# Altium PCB LC_MATCH_1.PcbDoc
Units mm, origin at the board's own origin, x right, y up, seen from the top; angles counter-clockwise.
Board outline 36.83 x 33.78 mm, 2 copper layers (Top Layer, Bottom Layer); 12 components, 7 nets, 36 pads, 14 vias.
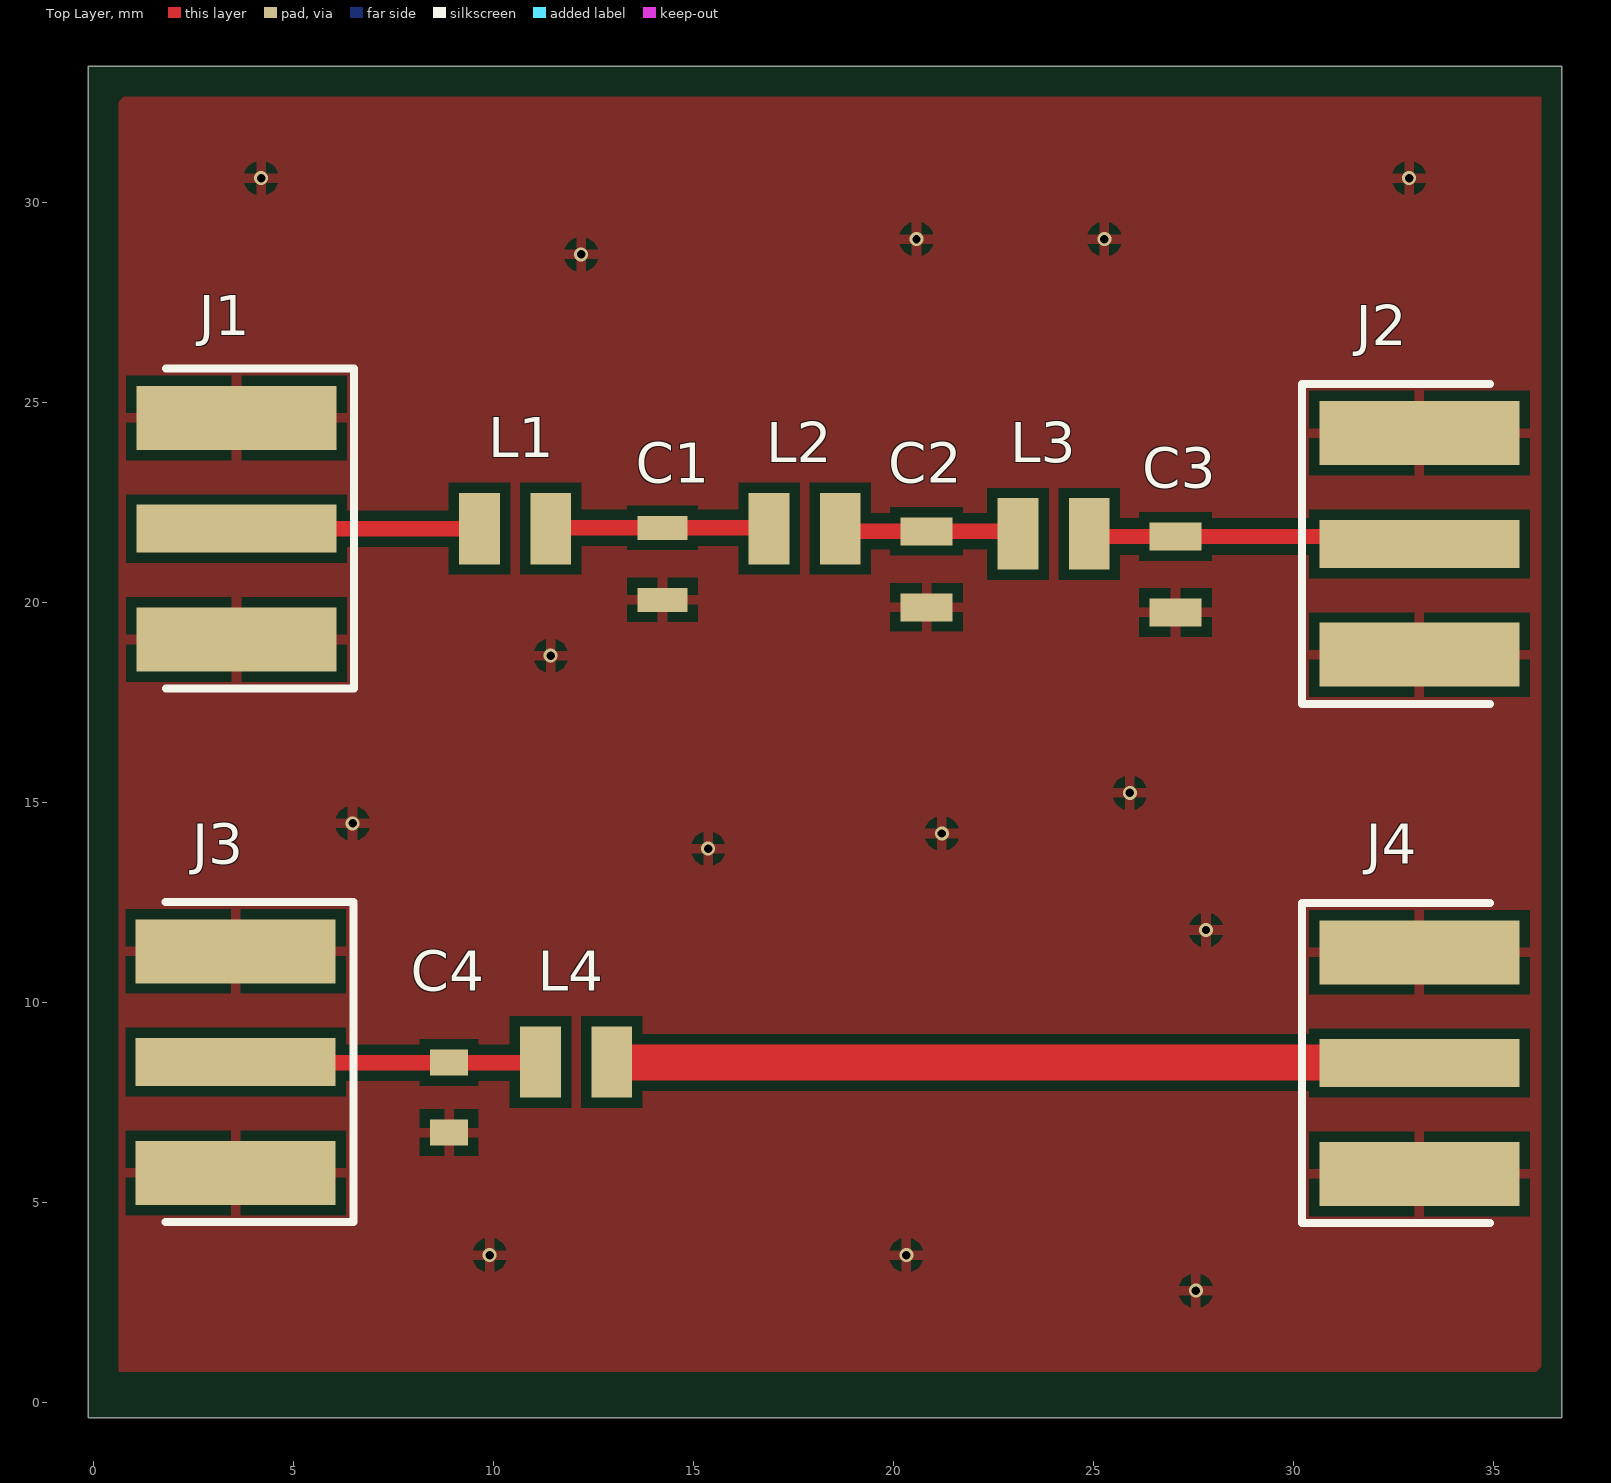
[diagram p0: Top Layer view]
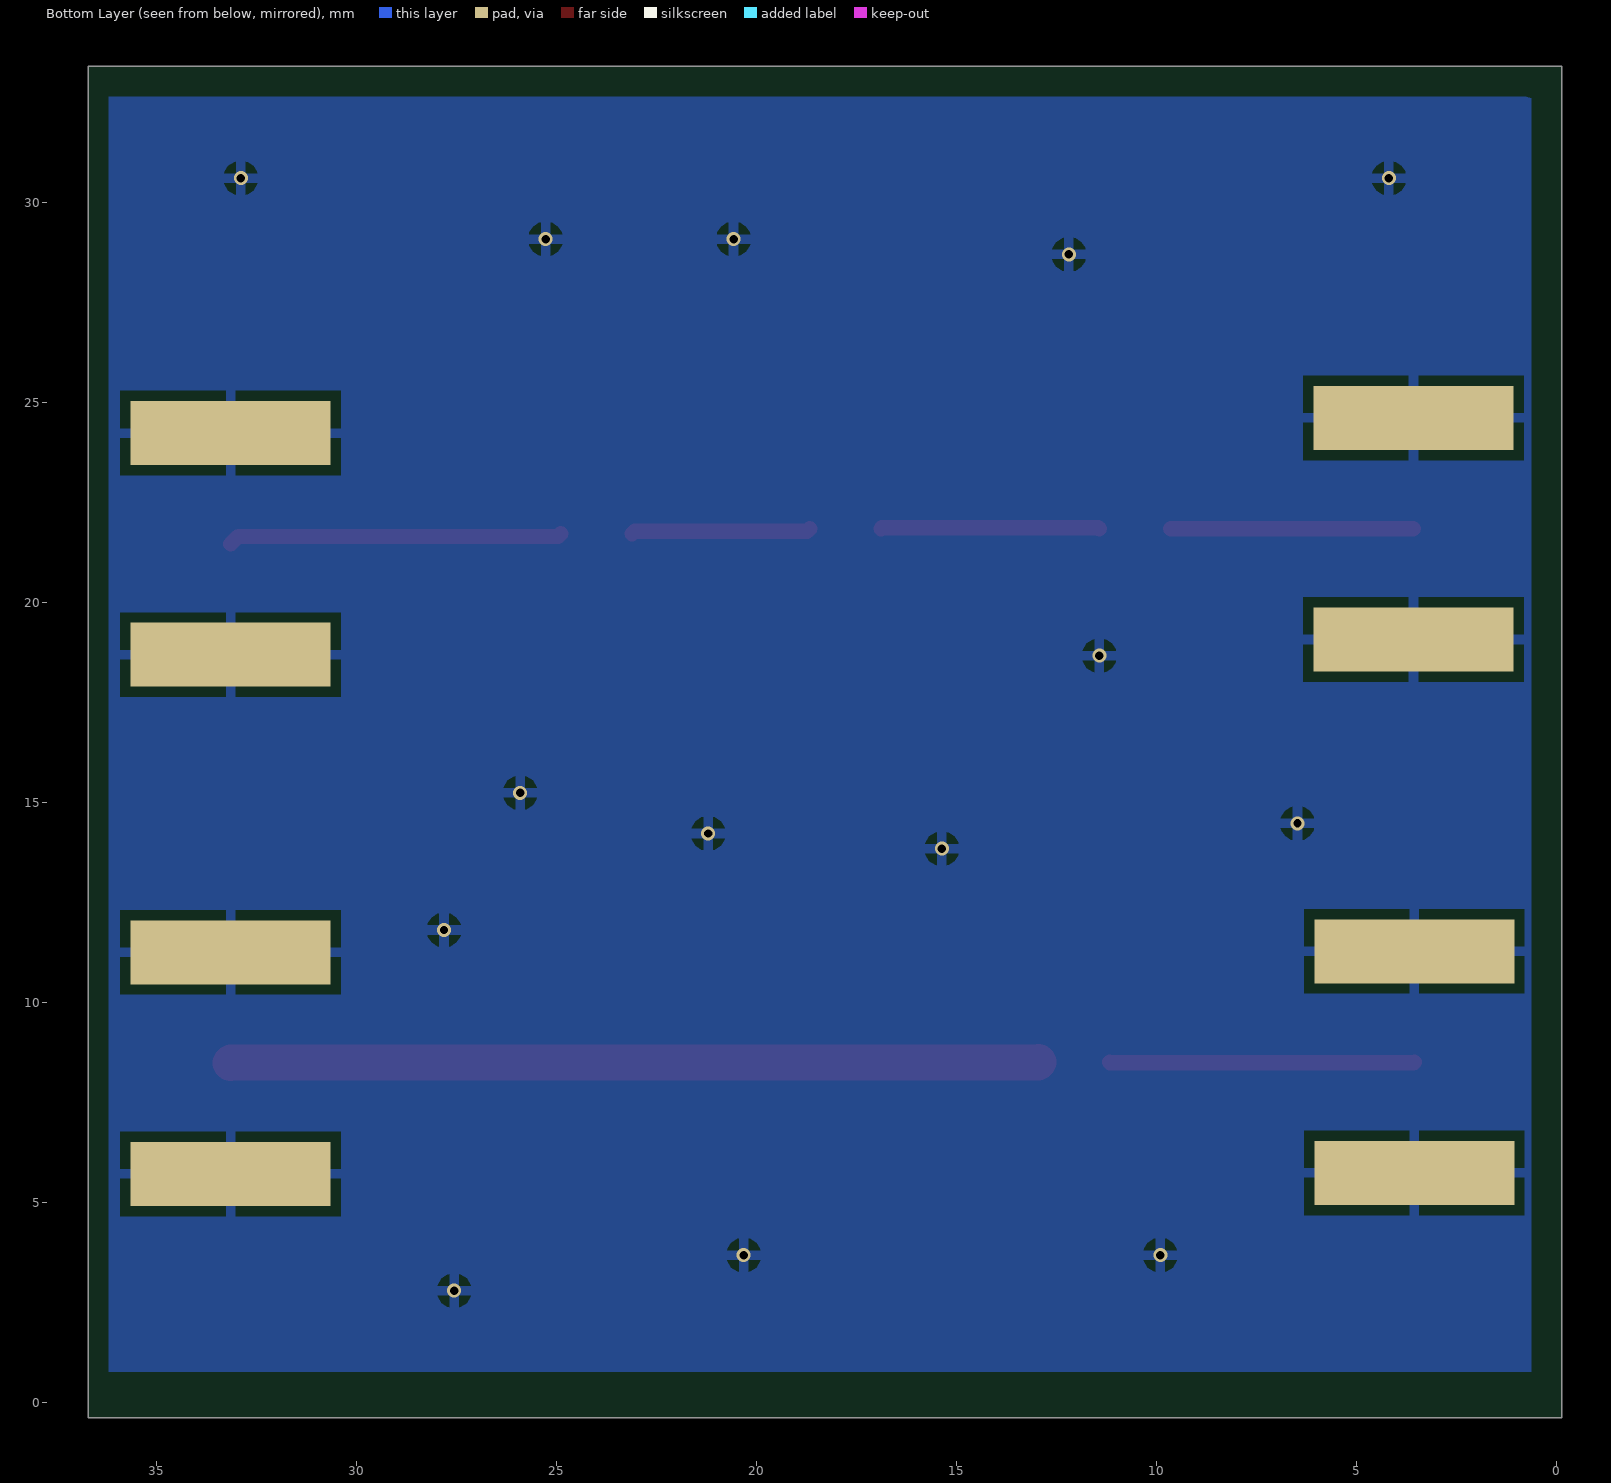
[diagram p1: Bottom Layer view, seen from below]
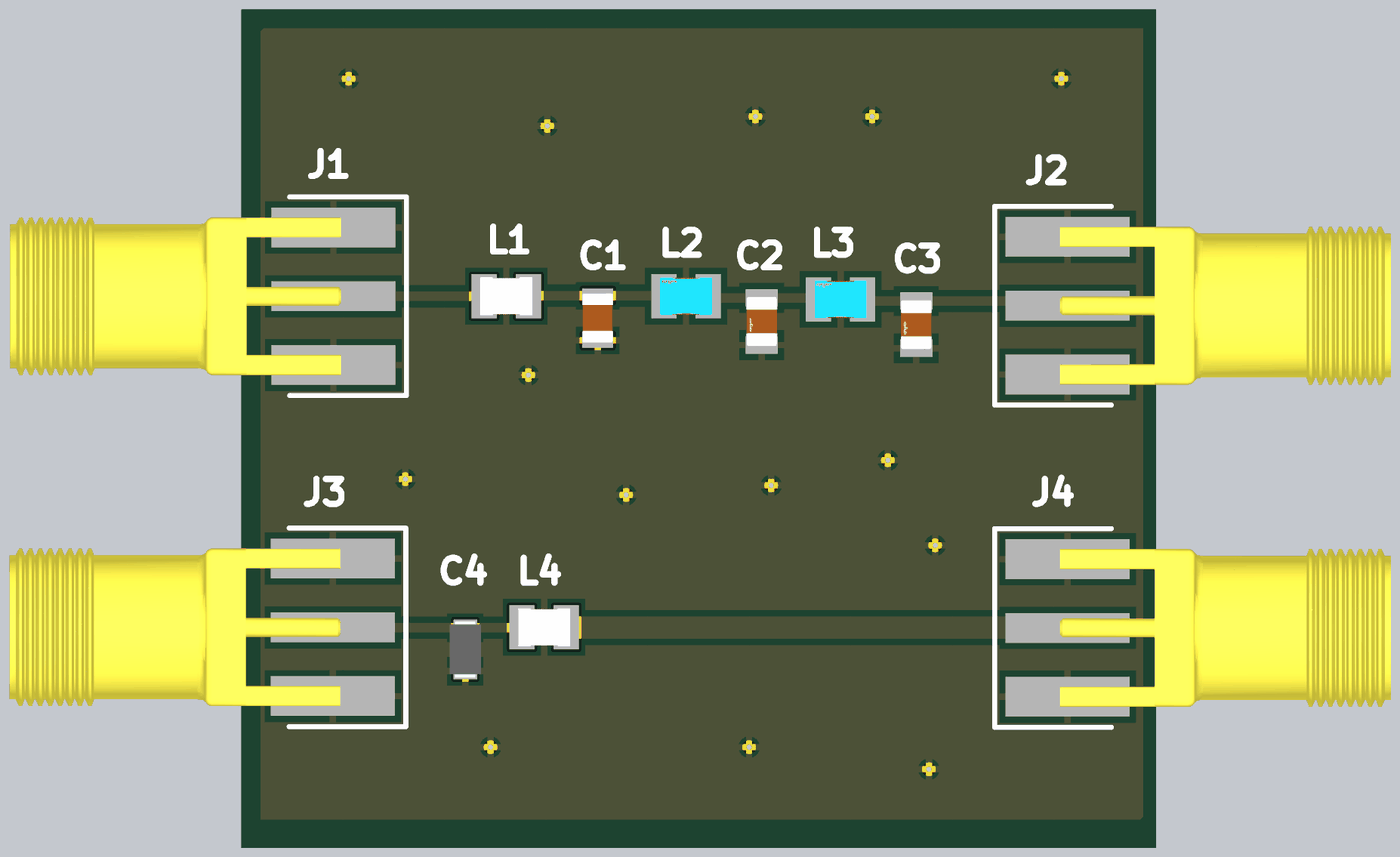
[diagram p2: 3D render of the assembled board from above, using the file's embedded part models]

## Layer stack, top to bottom
Top Solder: solder mask 0.0102, Solder Resist, Dk 3.5
Top Layer: signal copper 0.0356
Dielectric 1: dielectric 0.32, FR-4, Dk 4.8
Bottom Layer: signal copper 0.0356
Bottom Solder: solder mask 0.0102, Solder Resist, Dk 3.5

## Board outline
-0.127,-0.381 36.703,-0.381 36.703,33.401 -0.127,33.401

## Design rules (kind name [scope] priority, off if disabled: settings)
Clearance [All] p1: gap=0.254 ignorepadtopadclearanceinfootprint=FALSE except(0: Arc-Hole Track-Hole SMDPad-Hole THPad-Hole Via-Hole Fill-Hole Poly-Hole Region-Hole Text-Hole; 0.15: Arc-Arc Arc-Track Arc-SMDPad Track-Track Track-SMDPad SMDPad-SMDPad; 0.5: THPad-THPad)
MinimumSolderMaskSliver [All] p1: minsoldermaskwidth=0.1
PolygonConnect [All] p1: connectstyle=Relief reliefconductorwidth=0.254 reliefentries=4 polygonreliefangle="90 Angle" airgapwidth=0.254
RoutingLayers [All] p1: top layer_v5=TRUE bottom layer_v5=FALSE
RoutingVias [All] p1: holewidth=0.15 width=0.25 viastyle="Through Hole" minholewidth=0.15 minwidth=0.25 maxholewidth=0.2 maxwidth=0.3
SolderMaskExpansion [All] p1: expansion=0.102 istentingtop=FALSE
Width [All] p1: maxlimit=0.9 minlimit=0.15 preferedwidth=0.254 minimp=50.000000 maximp=50.000000 favimp=50.000000
28 further rules are at their usual default settings.

## Components (designator, comment, footprint, x,y, rotation, side; value= is the part's Value field where it differs from the comment)
C1 "GRM21A5C2J820JWA1D" GRM21x 14.224,20.966 r90 top
C2 "GQM2195C2E430GB12D" FP-GRM21A-0_2-MFG 20.828,20.828 r270 top
C3 "GQM2195C2E300GB12D" FP-GRM21A-0_2-MFG 27.051,20.701 r270 top
C4 "GQM2195C2E430GB12D" GQM2195C2E100GB12D 8.89,7.62 r90 top
J1 "CON-SMA-EDGE-S" FP-CON-SMA-EDGE-S-MFG -3.683,21.844 r90 top
J2 "CON-SMA-EDGE-S" FP-CON-SMA-EDGE-S-MFG 40.407,21.463 r270 top
J3 "CON-SMA-EDGE-S" FP-CON-SMA-EDGE-S-MFG -3.704,8.509 r90 top
J4 "CON-SMA-EDGE-S" FP-CON-SMA-EDGE-S-MFG 40.407,8.485 r270 top
L1 "LQW2BAS18NJ00L" LQW2BAN11NG00L 10.541,21.844 r0 top
L2 "LQW2BAS56NG00L" FP-LQW2BAN_00-MFG 17.78,21.844 r180 top
L3 "LQW2BAS56NG00L" FP-LQW2BAN_00-MFG 24.004,21.717 r180 top
L4 "LQW2BAS27NJ00L" LQW2BAN11NG00L 12.065,8.509 r0 top

## Footprints (in the part's own frame and the unit in brackets; to place one, negate y for a bottom-side part, rotate by r counter-clockwise, add the part's x,y. Pads: shape width x height; smd on the part's side, far side on the other; paste and mask are expansions set on the pad)
FP-CON-SMA-EDGE-S-MFG [mm]
  rect 1.2x5 smd paste+0 mask+0: 1(0,-7.26)
  rect 1.6x5 smd paste+0 mask+0: 2(-2.77,-7.26) 3(2.77,-7.26)
  rect 1.6x5 smd far side paste+0 mask+0: 4(-2.77,-7.26) 5(2.77,-7.26)
  silkscreen extent -4,-10.2 4,-5.5, body extent -3.67,-9.86 3.67,4.86, height 0.25
FP-GRM21A-0_2-MFG [mm]
  rect 0.7x1.3 smd paste+0 mask+0: 1(-0.95,0) 2(0.95,0)
  body extent -1.4,-0.82 1.4,0.82, height 0.25
FP-LQW2BAN_00-MFG [mm]
  rect 1.02x1.78 smd paste+0 mask+0: 1(-0.89,0) 2(0.89,0)
  body extent -1.5,-0.99 1.5,0.99, height 0.25
GQM2195C2E100GB12D [mm]
  rect 0.65x0.95 smd: 1(-0.875,0) 2(0.875,0)
  body extent -1.13,-0.63 1.13,0.63, height 1.1
GRM21x [mm]
  rect 0.6x1.25 smd: 1(-0.9,0) 2(0.9,0)
  body extent -1,-0.63 1,0.63, height 1
LQW2BAN11NG00L [mm]
  rect 1.02x1.78 smd: 1(-0.89,0) 2(0.89,0)
  body extent -1.04,-0.76 1.04,0.76, height 1.52

## Part data
C1 C4: "Capacitor", Manufacturer_Name="Murata Electronics"
  C1: Datasheet Link=https://search.murata.co.jp/Ceramy/image/img/A01X/G101/ENG/GRM21A5C2J820JWA1-01.pdf, Height=1.25mm, Manufacturer_Part_Number=GRM21A5C2J820JWA1D
  C4: Datasheet Link=https://psearch.en.murata.com/capacitor/product/GQM2195C2E430GB12%23.html, Height=1mm, Manufacturer_Part_Number=GQM2195C2E430GB12D
C2 C3: library part CMP-06035-012030-1, "Chip Multilayer Ceramic Capacitors for General Purpose, 0805, 1000pF, C0G, 30ppm/°C, 1%, 250V"
J1 J2 J3 J4: library part CMP-204357-000001-1, "CONN SMA JACK STR EDGE MNT", Frequency=18GHz, Manufacturer="RF Solutions Ltd.", Package=CONN_JACK, Automotive=No, Category=Conn, ComponentLink2Description=Datasheet, ComponentLink2URL=https://www.rfsolutions.co.uk/downloads/1498648656DS-CON-EDGE-SMA-4.pdf, Conn Orientation="Right Angle", Contact Material=Gold, Device Class L1=Connectors, Device Class L2="RF / Coaxial Connectors", Device Class L3=unset, Digikey Description="CONN SMA JACK STR EDGE MNT", Footprint Url=https://forum.upverter.com/uploads/default/original/3X/b/e/be75b907af57498775929d6d9099689c472e0307.pdf, Height=6.35mm, Impedance=50Ω, Is Female=yes, Lead Free=Yes, Manufacturer Part Number=CON-SMA-EDGE-S, Number Of Contacts=1, Octopart=https://octopart.com/con-sma-edge-s-rf+solutions-70967450, RoHS=TRUE, Shielding=true
L1: "Inductor", Manufacturer_Name="Murata Electronics", Mouser Part Number=81-LQW2BAS18NJ00L, Arrow Part Number=LQW2BAS18NJ00L, Arrow Price/Stock=https://www.arrow.com/en/products/lqw2bas18nj00l/murata-manufacturing, Datasheet Link=https://psearch.en.murata.com/inductor/product/LQW2BAS18NJ00%23.html, Height=1.52mm, Manufacturer_Part_Number=LQW2BAS18NJ00L, Mouser Price/Stock=https://www.mouser.co.uk/ProductDetail/Murata-Electronics/LQW2BAS18NJ00L?qs=XY81OjNnpal2Dbjq17m9Aw%3D%3D
L2 L3: library part CMP-06042-001883-1, "Wire Wound RF Inductor 56nH ±2% 500mA 0.34Ω 0805 (2015)", Case/Package=0805, Current Rating=500mA, DC Resistance (DCR)=340mR, Inductance=56nH, Max Operating Temperature=85°C, Min Operating Temperature=-40°C, Package Quantity=2000, Resistor Type=Wirewound, Self Resonant Frequency=1.6GHz, Test Frequency=200MHz, Tolerance=2%, Height - Seated (Max)=0.061inch, Length=0.082inch, Mount="Surface Mount", Packaging="Tape and Reel", Shielding=Unshielded, Width=0.06inch
L4: "Inductor", Manufacturer_Name="Murata Electronics", Mouser Part Number=81-LQW2BAS27NJ00L, Datasheet Link=https://psearch.en.murata.com/inductor/product/LQW2BAS27NJ00%23.html, Height=1.52mm, Manufacturer_Part_Number=LQW2BAS27NJ00L, Mouser Price/Stock=https://www.mouser.com/Search/Refine.aspx?Keyword=81-LQW2BAS27NJ00L

## Via types
v1: diameter 0.35, hole 0.21, Top Layer to Bottom Layer, 14 vias

## Nets (pads, with @x,y where several pads share a name; then routed paths per layer and width w, separated by ;. In a path a pad name is that pad's centre, name@x,y a point inside that pad or via, vN(x,y) a via of type N, cw(c..) or ccw(c..) an arc to the next point about the centre after c; other vN are vias at no path point)
GND: C1.1 C2.2 C3.2 C4.1 J1.2 J1.3 J1.4 J1.5 J2.2 J2.3 J2.4 J2.5 J3.2 J3.3 J3.4 J3.5 J4.2 J4.3 J4.4 J4.5
  other v1: 27.559,2.794 9.906,3.683 20.32,3.683 27.813,11.811 15.367,13.843 21.209,14.224 6.477,14.478 25.908,15.24 11.43,18.669 12.192,28.702 20.574,29.083 25.273,29.083 4.191,30.607 32.893,30.607
NetC1_2: C1.2 L1.2 L2.2 | length 5.5
  Top Layer w0.381: L1.2 11.453,21.866 C1.2 16.868,21.866 L2.2
NetC2_1: C2.1 L2.1 L3.2 | length 4.5
  Top Layer w0.381: L2.1 18.736,21.778 C2.1 23.053,21.778 L3.2
NetC3_1: C3.1 J2.1 L3.1 | length 8.4
  Top Layer w0.381: L3.1 24.96,21.651 C3.1 32.959,21.651 J2.1
NetC4_2: C4.2 J3.1 L4.1 | length 7.6
  Top Layer w0.381: J3.1 3.57,8.495 C4.2 11.161,8.495 L4.1
NetJ1_1: J1.1 L1.1 | length 6.1
  Top Layer w0.381: J1.1 L1.1
NetJ4_1: J4.1 L4.2 | length 20.2
  Top Layer w0.9: L4.2 12.967,8.497 33.135,8.497 J4.1

## Polygon pours and split planes (outlines as drawn)
GND on Bottom Layer "NONET_L-01_P-001" (solid, pour order 1): 0.635,32.766 0.762,32.639 36.195,32.639 36.195,0.762 35.56,0.762 0.635,0.762
GND on Top Layer "NONET_L-01_P-001" (solid, pour order 2): 0.635,32.512 0.762,32.639 36.195,32.639 36.195,0.889 36.068,0.762 0.635,0.762

## Silkscreen, mask and mechanical layers (free items; w line width, h text height)
Mechanical 1:
  lines w0.254: 0.635,32.766 36.195,32.766 36.449,32.766 36.449,0 0.127,0 0.127,32.766 1.143,32.766